# Altium PCB PCB.PcbDoc (part 2 of 2)
Units mm, origin at the board's own origin, x right, y up, seen from the top; angles counter-clockwise.
Board outline 44.3 x 31.8 mm, 4 copper layers (Top Layer, Int1 (GND), Int2 (PWR), Bottom Layer), stack 1.369 mm thick; 105 components, 87 nets, 372 pads, 193 vias.
Unrouted connection lines stored in the file: 3.
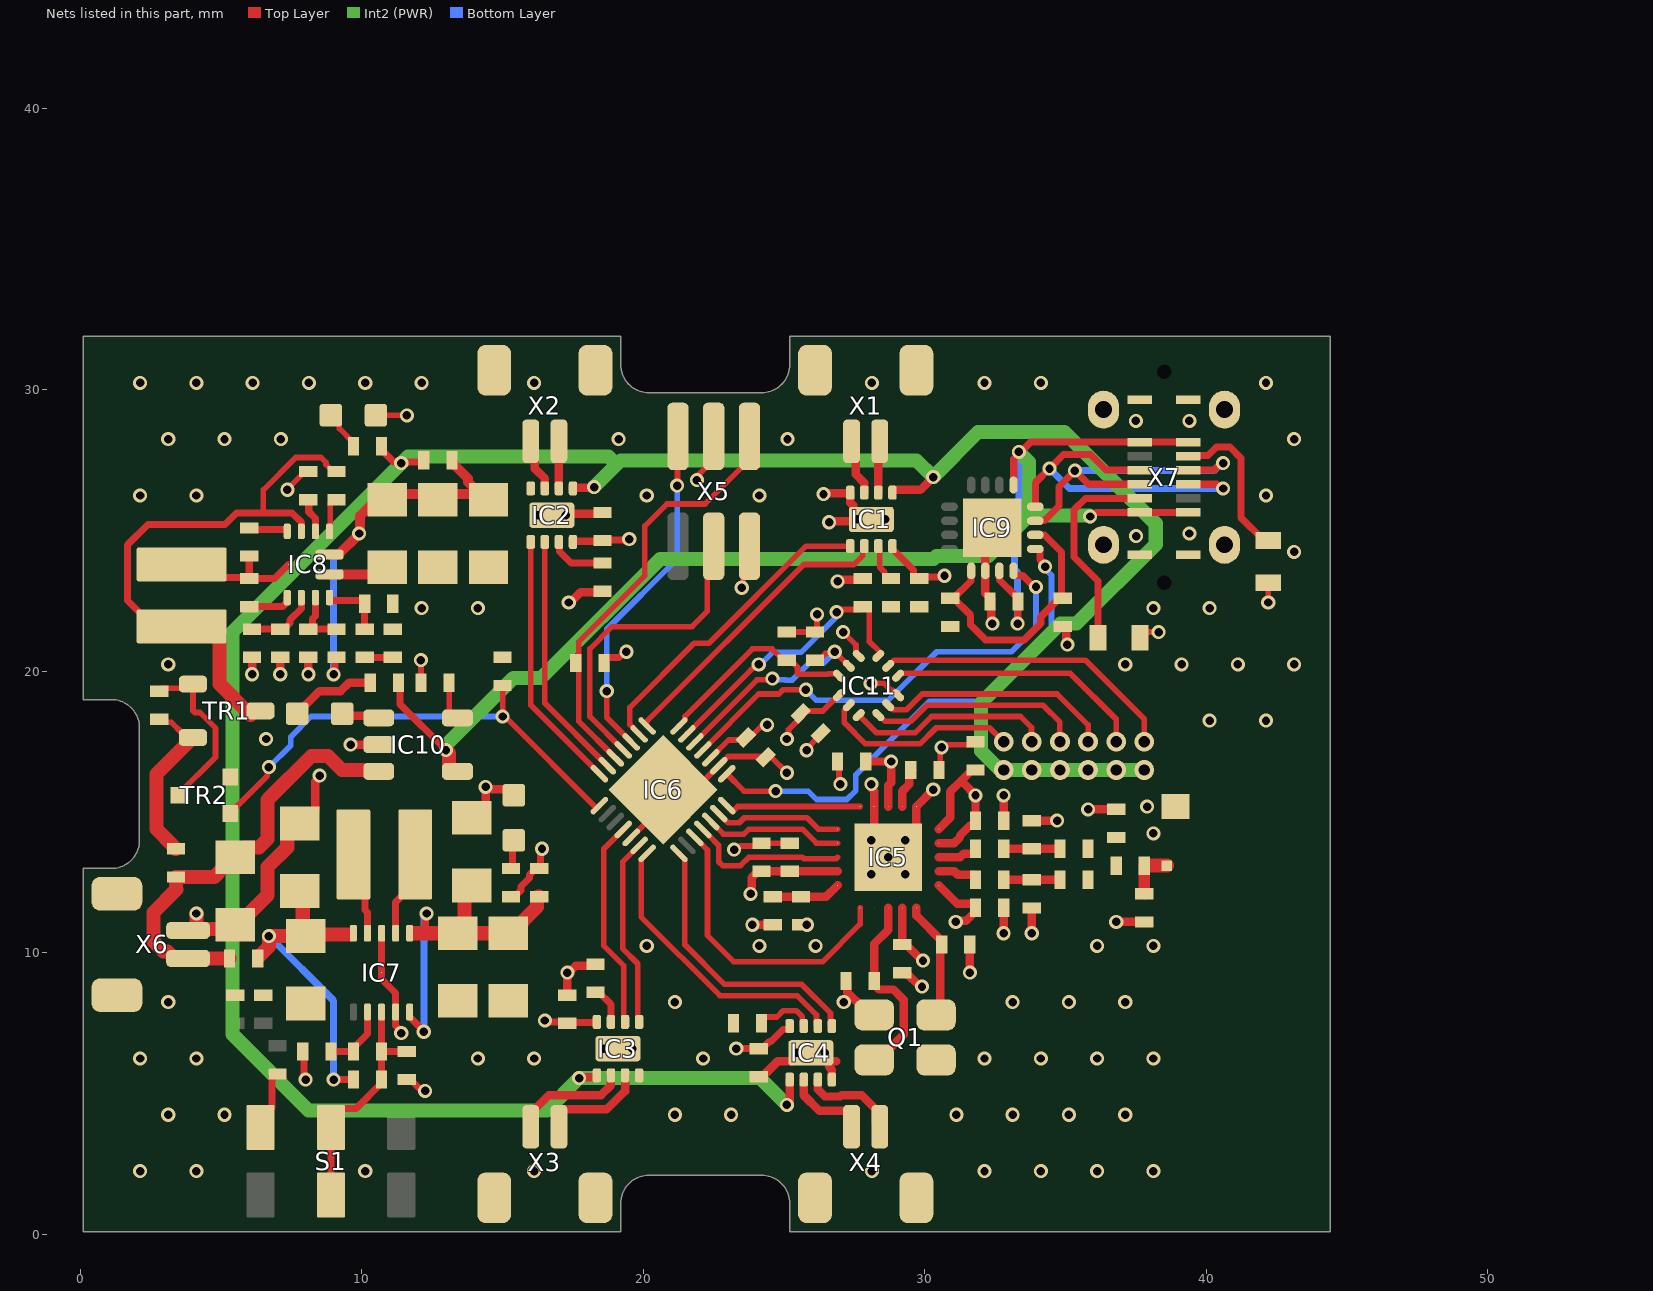
[diagram p4: the nets of this part, all layers, seen from the top]

## Via types
v1: diameter 0.5, hole 0.3, Top Layer to Bottom Layer, tented bottom, 179 vias
v2: diameter 0.7, hole 0.4, Top Layer to Bottom Layer, 14 vias

## Nets (pads, with @x,y where several pads share a name; then routed paths per layer and width w, separated by ;. In a path a pad name is that pad's centre, name@x,y a point inside that pad or via, vN(x,y) a via of type N, cw(c..) or ccw(c..) an arc to the next point about the centre after c; other vN are vias at no path point) (continued)
GND: C1.1 C5.2 C6.2 C7.1 C8.1 C9.1 C10.1 C11.1 C12.1 C13.1 C14.1 C15.1 C16.2 C17.2 C18.2 C19.1 C20.1 C21.1 C22.1 C23.1 C24.1 C25.1 C27.1 C28.1 C29.1 C30.2 C31.2 C32.2 C33.2 C34.2 C35.1 C36.1 C37.1 C38.1 C39.1 C40.1 C41.1 D1.2 D2.2 IC1.4 IC1.9 IC2.4 IC2.9 IC3.4 IC3.9 IC4.4 IC4.9 IC5.16 IC5.19 IC5.21 IC6.5 IC6.16 IC6.29 IC7.3 IC7.9 IC7.11 IC8.5 IC9.2 IC9.17 IC10.2 IC11.6 IC11.10 L3.1 P1.2 Q1.2 Q1.4 R1.1 R3.1 R6.1 R8.1 R18.1 R19.1 R21.1 R22.1 R26.1 R28.1 R29.1 R30.1 R31.1 R33.1 TR2.2 X1.0 X2.0 X3.0 X4.0 X5.3 X6.0 X6.2 X7.A1 X7.A12 X7.B1 X7.B12 X7.SHELL | length 74
  Top Layer w0.2: v1(7.352,26.454) 7.352,26.477 7.975,27.1 R19.1@8.1,27.1 ; D2.2@10.5,29.1 v1(11.6,29.1) ; R26.1@12.1,19.6 v1(12.1,20.4) ; IC6.5@19.569,14.103 20.7,15.234 IC6.29@20.7,15.8 21.831,15.8 IC6.16@22.68,16.649 23.009,16.978 24.157,16.978 24.271,16.864 24.383,16.976 24.524,16.976 v1(25.1,16.4) ; v1(21.9,26.8) 21.957,26.857 21.957,26.987 22.5,27.53 X5.3@22.5,28.35 ; v1(23.228,13.672) 23.309,13.672 23.437,13.8 24.1,13.8 C7.1@24.2,13.9 C9.1@25.2,13.9 ; v1(25.8,17.2) 25.8,17.25 26.3,17.75 C41.1@26.3,17.8 ; C11.1@26.9,16.8 26.95,16.75 26.95,16.05 v1(27,16) ; v1(27.1,21.4) 27.557,20.943 27.557,20.65 IC11.10@27.654,20.554 ; v1(28.075,19.575) 28.548,19.575 28.791,19.332 28.859,19.332 29.037,19.154 IC11.6@29.054,19.154 ; R1.1@30.5,16.5 30.55,16.55 30.55,17.25 v1(30.6,17.3) 30.681,17.3 30.781,17.4 31.7,17.4 C15.1@31.8,17.5 C15.1@31.925,17.5 ; R22.1@37.65,21.2 37.85,21.4 v1(38.307,21.4) ; v1(42.2,22.45) R21.1@42.2,23.15
  Top Layer w0.25: R6.1@7.9,6.5 7.952,6.448 7.952,5.548 v1(8,5.5) ; IC7.3@10.7,10.7 10.7,9.075 11.2,8.575 11.2,7.418 11.4,7.218 v1(11.4,7.15) ; C24.1@11.6,5.5 11.725,5.5 12.077,5.148 12.202,5.148 v1(12.25,5.1)
  Top Layer w0.3: v1(6.1,19.9) C32.2@6.1,20.5 ; v1(7.1,19.9) C33.2@7.1,20.5 ; C22.1@7.9,14.6 8.35,15.05 8.35,16.096 8.5,16.246 v1(8.5,16.3) ; v1(8.1,19.9) R18.1@8.1,20.5 ; v1(9.6,17.4) IC10.2@10.6,17.4 ; C20.1@13.9,14.8 13.95,14.8 14.4,15.25 v1(14.4,15.9) 14.454,15.9 14.547,15.807 15.193,15.807 D1.2@15.4,15.6 ; v1(17.25,25.55) 17.3,25.6 18.5,25.6 C38.1@18.55,25.65 ; C39.1@17.3,8.5 v1(17.3,9.3) 17.354,9.3 17.604,9.55 18.25,9.55 R30.1@18.3,9.6 ; v1(17.35,22.45) 17.404,22.45 17.775,22.821 18.521,22.821 R29.1@18.55,22.85 ; v1(23.874,11) C8.1@24.6,11 ; C40.1@24.1,5.6 24.225,5.6 24.775,6.15 25.3,6.15 25.45,6.3 v1(25.45,6.45) ; C10.1@25.6,11 v1(25.807,11) ; v1(26.4,26.3) 26.425,26.325 27.35,26.325 IC1.4@27.35,26.35 27.35,25.999 27.45,25.899 27.45,25.55 v1(27.6,25.4) 27.538,25.338 26.638,25.338 v1(26.6,25.3) ; v1(26.45,6.45) 26.45,6.3 IC4.9@26.6,6.15 ; IC4.4@26.7,5.5 26.7,5.851 26.6,5.951 IC4.9@26.6,6.15 ; 26.85,6.15 IC4.9@26.6,6.15 ; v1(26.9,23.2) 26.954,23.2 27.004,23.25 27.75,23.25 R3.1@27.8,23.3 ; C17.2@27.2,9 27.25,8.95 27.25,8.6 Q1.4@27.8,8.05 ; v1(28.1,14) IC5.21@28.2,13.9 ; v1(28.1,16) 28.138,15.962 28.138,15.807 28.2,15.745 IC5.21@28.2,13.9 ; v1(28.7,13.4) IC5.21@28.2,13.9 ; C12.1@29.2,9.3 29.25,9.25 29.375,9.25 29.787,8.838 29.862,8.838 v1(29.9,8.8) ; IC5.21@29.7,14.4 IC5.16@29.7,15.2 v1(30.3,15.8) ; v1(31.6,9.3) C16.2@31.6,10.3 ; v1(32.4,21.7) 32.362,21.738 32.362,22.563 32.15,22.775 32.15,24.85 IC9.17@32.4,25.1 ; v1(32.8,10.7) C13.1@32.8,11.6 ; C14.1@32.8,14.7 v1(32.8,15.6) ; v1(33.8,10.7) C1.1@33.8,11.6 ; L3.1@33.8,14.7 v1(34.7,14.7) ; v1(35.8,15.1) C5.2@36.8,15.1 ; v1(36.8,11.1) C6.2@37.8,11.1
  Top Layer w0.35: IC8.5@8.85,23.45 10.25,23.45 10.6,23.8 10.8,23.8 C29.1@10.9,23.7
  Top Layer w0.5: v1(4.121,11.4) X6.2@4.121,10.85 ; C22.1@7.9,14.6 7.7,14.6 7.35,14.25 7.35,13.75 6.65,13.05 6.65,12.05 5.6,11 C36.1@5.5,11 5.35,10.85 3.875,10.85 X6.2@3.825,10.8 X6.2@4.071,10.8 ; X6.2@4.071,10.8 X6.2@4.121,10.85 ; X6.2@4.071,10.8 X6.2@4.121,10.85
  other v1: 2.121,2.25 4.121,2.25 10.121,2.25 16.121,2.25 28.121,2.25 32.121,2.25 34.121,2.25 36.121,2.25 38.121,2.25 3.121,4.25 5.121,4.25 21.121,4.25 23.121,4.25 31.121,4.25 33.121,4.25 35.121,4.25 37.121,4.25 2.121,6.25 4.121,6.25 14.121,6.25 16.121,6.25 22.121,6.25 32.121,6.25 34.121,6.25 36.121,6.25 38.121,6.25 18.6,6.6 19.6,6.6 3.121,8.25 21.121,8.25 27.121,8.25 33.121,8.25 35.121,8.25 37.121,8.25 20.121,10.25 24.121,10.25 26.121,10.25 36.121,10.25 38.121,10.25 28.1,12.8 29.3,12.8 29.3,14 38.121,14.25 37.9,15.2 6.6,17.6 40.121,18.25 42.121,18.25 3.121,20.25 37.121,20.25 39.121,20.25 41.121,20.25 43.121,20.25 12.121,22.25 14.121,22.25 38.121,22.25 40.121,22.25 43.121,24.25 37.505,24.805 39.4,24.9 28.6,25.4 16.25,25.55 2.121,26.25 4.121,26.25 20.121,26.25 24.121,26.25 42.121,26.25 3.121,28.25 5.121,28.25 7.121,28.25 19.121,28.25 25.121,28.25 43.121,28.25 37.5,28.9 39.4,28.9 2.121,30.25 4.121,30.25 6.121,30.25 8.121,30.25 10.121,30.25 12.121,30.25 16.121,30.25 28.121,30.25 32.121,30.25 34.121,30.25 42.121,30.25
ICSPCLK: IC6.24 X5.5 | length 12.3
  Top Layer w0.2: v1(18.7,19.3) 18.7,18.366 IC6.24@19.569,17.497 ; v1(21.2,26.6) 21.215,26.615 21.215,28.335 X5.5@21.23,28.35
  Bottom Layer w0.2: v1(18.7,19.3) 18.7,21.5 21.2,24 v1(21.2,26.6)
ICSPDAT: IC6.25 X5.4 | length 11.2
  Top Layer w0.2: IC6.25@19.286,17.214 18.1,18.4 18.1,20.8 18.893,21.593 21.727,21.593 22.276,22.142 22.276,24.226 X5.4@22.5,24.45
M1_IN1: IC1.6 IC6.22 | length 10.7
  Top Layer w0.2: IC6.22@20.134,18.063 20.049,18.149 20.134,18.234 25.7,23.8 27.48,23.8 27.8,24.12 27.8,24.4 IC1.6@27.85,24.45
M1_IN2: IC1.5 IC6.23 | length 11.3
  Top Layer w0.2: IC6.23@19.851,17.78 19.522,18.109 19.522,18.722 21.8,21 22.334,21 25.784,24.45 IC1.5@27.35,24.45
M2_IN1: IC2.6 IC6.27 | length 8.9
  Top Layer w0.2: IC2.6@16.5,24.6 16.5,18.869 IC6.27@18.72,16.649
M2_IN2: IC2.5 IC6.28 | length 9.2
  Top Layer w0.2: IC2.5@16,24.6 16,18.803 IC6.28@18.437,16.366
M3_IN1: IC3.6 IC6.4 | length 7.4
  Top Layer w0.2: IC6.4@19.286,14.386 18.6,13.7 18.6,10.249 19.3,9.549 19.3,7.815 19.3,7.6 IC3.6@19.35,7.55
M3_IN2: IC3.5 IC6.6 | length 6.8
  Top Layer w0.2: IC3.5@19.85,7.55 19.8,7.6 19.8,9.615 19.264,10.151 19.264,13.232 IC6.6@19.851,13.82
M4_IN1: IC4.6 IC6.7 | length 10.4
  Top Layer w0.2: IC6.7@20.134,13.537 19.922,13.325 19.922,11.281 22.72,8.483 25.463,8.483 26.15,7.796 26.15,7.45 IC4.6@26.2,7.4
M4_IN2: IC4.5 IC6.8 | length 10
  Top Layer w0.2: IC6.8@21.266,13.537 21.478,13.325 21.478,10.291 22.886,8.883 25.629,8.883 26.65,7.862 26.65,7.45 IC4.5@26.7,7.4
M\C\L\R\: IC6.26 R2.1 X5.1 | length 15.3
  Top Layer w0.2: R2.1@17.6,20.3 R2.1@17.7,20.2 ; R2.1@17.7,20.3 R2.1@17.7,20.2 ; R2.1@17.7,20.4 17.7,21.051 20.055,23.405 20.055,25.168 20.837,25.95 22.19,25.95 23.77,27.53 X5.1@23.77,28.35 ; IC6.26@19.003,16.931 17.7,18.234 R2.1@17.7,20.2
MISO: IC5.2 IC6.12 | length 5
  Top Layer w0.2: IC6.12@22.397,14.669 22.844,14.222 23.573,14.222 23.751,14.4 25.649,14.4 26.149,13.9 IC5.2@26.9,13.9
MOSI: IC5.20 IC6.14 | length 4.9
  Top Layer w0.2: IC6.14@22.963,15.234 23.175,15.022 23.353,15.2 IC5.20@27.7,15.2
NetC1_2: C1.2 C2.2 L1.1 | length 2
  Top Layer w0.3: C2.2@32.8,12.6 L1.1@34.8,12.6
NetC3_2: C3.2 C4.2 L3.2 | length 2
  Top Layer w0.3: C3.2@32.8,13.7 C4.2@34.8,13.7
NetC4_1: C4.1 C5.1 L1.2 L2.1
NetC6_1: C6.1 L2.2 P1.1 | length 1.7
  Top Layer w0.4: C6.1@37.8,12.1 L2.2@37.8,13.1
  Top Layer w0.5: L2.2@37.858,13.1 P1.1@38.6,13.1
NetC8_2: C8.2 C10.2 IC5.5 | length 2.5
  Top Layer w0.3: C8.2@24.6,12 26.5,12 IC5.5@26.9,12.4
NetC16_1: C16.1 IC5.10 Q1.3 | length 4.3
  Top Layer w0.3: IC5.10@29.7,11.6 29.7,11.325 30.6,10.425 30.55,10.375 30.55,7.95 Q1.3@30.4,7.8
NetC17_1: C17.1 IC5.8 Q1.1 | length 6.9
  Top Layer w0.3: Q1.1@28.2,6.2 28.35,6.2 29.25,7.1 29.25,8.334 28.884,8.7 28.375,8.7 28.2,8.875 28.2,10.32 28.7,10.82 IC5.8@28.7,11.6
NetC19_2: C19.2 C20.2 C21.2 IC7.1 IC7.10 R10.1 | length 13
  Top Layer w0.25: IC7.10@11.7,7.9 11.7,7.725 12.2,7.225 v1(12.2,7.2) ; 12.25,10.7 12.25,10.938 12.252,10.94 12.252,11.352 v1(12.3,11.4)
  Top Layer w0.5: 11.825,10.7 12.25,10.7 C19.2@13.4,10.7 ; C20.2@13.9,12.4 13.65,12.15 13.65,10.95 C19.2@13.4,10.7 ; R10.1@16.3,12 16.275,12 16.225,11.95 16.225,11.625 15.3,10.7 C19.2@13.4,10.7
  Bottom Layer w0.25: v1(12.2,7.2) 12.2,11.232 12.3,11.332 v1(12.3,11.4)
NetC22_2: C22.2 C23.2 IC7.5 R4.1 R9.2 | length 12.2
  Top Layer w0.25: v1(9,5.5) R4.1@9.7,5.5
  Top Layer w0.5: R9.2@6.35,9.875 6.7,10.225 v1(6.7,10.6) C23.2@8,10.6 ; C22.2@7.8,12.2 7.9,12.1 7.9,10.7 C23.2@8,10.6 ; IC7.5@9.575,10.65 8.05,10.65 C23.2@8,10.6
  Bottom Layer w0.25: v1(6.7,10.6) 9,8.3 v1(9,5.5)
NetC26_1: C26.1 IC8.10 | length 1.4
  Top Layer w0.25: C26.1@6,25.1 6.062,25.037 7.35,25.037 IC8.10@7.35,24.975
NetC26_2: C26.2 IC8.11 L5.2 R14.2 | length 5
  Top Layer w0.25: L5.2@3.6,23.8 4.058,23.342 5.958,23.342 R14.2@6,23.3 ; C26.2@6,24.1 R14.2@6,23.3 ; IC8.11@7.4,23.8 6.9,23.3 R14.2@6,23.3
NetC27_2: C27.2 C28.2 C29.2 IC8.6 R13.1 R15.2 | length 15.9
  Top Layer w0.25: v1(8.999,19.899) 9.046,19.946 9.046,20.446 R15.2@9.1,20.5
  Top Layer w0.35: v1(9.9,24.9) 9.9,24.875 IC8.6@9.175,24.15 ; v1@9.959,24.939 9.929,24.969 9.929,25.529 10.6,26.2 10.8,26.2 C29.2@10.9,26.1 ; R13.1@13.2,27.5 13.2,27.375 13.225,27.35 13.28,27.35 13.775,26.855 13.775,26.725 C27.2@14.3,26.2 ; C27.2@14.5,26.1 14.3,26.3 C28.2@12.9,26.3 ; IC8.6@9.175,24.15 IC8.6@8.85,24.15 IC8.6@9.175,24.15 ; C29.2@10.9,26.1 C29.2@11.1,26.3 ; C29.2@10.9,26.1 C29.2@11.1,26.3 ; C29.2@11.1,26.3 12.5,26.3 C28.2@12.7,26.1 ; C28.2@12.7,26.1 C28.2@12.9,26.3 ; C28.2@12.7,26.1 C28.2@12.9,26.3
  Bottom Layer w0.25: v1(8.999,19.899) 8.999,23.998 v1(9.9,24.9)
NetC30_1: C30.1 IC8.4 R17.2 | length 2.3
  Top Layer w0.25: IC8.4@8.85,22.625 8.85,22.512 10.025,22.512 10.1,22.437 R17.2@10.1,21.5
NetC31_1: C31.1 R17.1 | length 1.1
  Top Layer w0.25: R17.1@10,20.5 C31.1@11.1,20.5
NetC32_1: C32.1 C33.1 IC8.2 | length 2.5
  Top Layer w0.25: C32.1@6.1,21.5 7.225,21.5 7.45,21.725 7.45,21.835 7.85,22.235 IC8.2@7.85,22.625
NetC35_2: C35.2 IC9.1 IC9.6 R23.2 | length 9.6
  Top Layer w0.25: C35.2@30.9,22.6 C35.2@31.025,22.6 ; IC9.1@31.65,23.575 31.64,23.565 31.64,23.215 C35.2@31.025,22.6 ; IC9.6@33.925,24.85 33.935,24.84 34.256,24.84 34.85,24.247 34.85,22.65 R23.2@34.9,22.6 34.775,22.6 34.119,21.944 34.119,21.706 33.538,21.125 32.162,21.125 31.631,21.656 31.631,21.994 C35.2@31.025,22.6
NetD1_1: D1.1 R7.1 | length 1
  Top Layer w0.25: R7.1@15.3,13 15.35,13.05 15.35,13.95 D1.1@15.4,14
NetD2_1: D2.1 R16.1 | length 1.4
  Top Layer w0.2: D2.1@8.9,29.1 9.2,28.8 9.2,28.625 9.7,28.125 R16.1@9.7,28
NetD3_1: D3.1 R27.2 | length 3.1
  Top Layer w0.3: D3.1@7.7,18.5 8.499,19.299 9.247,19.299 9.549,19.6 R27.2@10.3,19.6
NetD3_2: D3.2 IC10.1 | length 1.4
  Top Layer w0.3: D3.2@9.3,18.5 9.375,18.425 10.525,18.425 IC10.1@10.6,18.35
NetIC1_2: IC1.2 X1.2 | length 1.8
  Top Layer w0.3: IC1.2@28.35,26.35 28.35,28.125 X1.2@28.4,28.175
NetIC1_3: IC1.3 X1.1 | length 2
  Top Layer w0.3: X1.1@27.4,28.175 27.55,28.025 27.55,27.001 27.85,26.701 IC1.3@27.85,26.35
NetIC1_7: IC1.7 R28.2 | length 1.4
  Top Layer w0.2: IC1.7@28.35,24.45 28.4,24.4 28.4,23.7 28.575,23.525 28.575,23.4 28.675,23.3 R28.2@28.8,23.3
NetIC2_2: IC2.2 X2.2 | length 1.7
  Top Layer w0.3: IC2.2@17,26.5 X2.2@17,28.175
NetIC2_3: IC2.3 X2.1 | length 1.9
  Top Layer w0.3: X2.1@16,28.175 16.15,28.025 16.15,27.201 16.5,26.851 IC2.3@16.5,26.5
NetIC2_7: IC2.7 R29.2 | length 2
  Top Layer w0.25: IC2.7@17,24.6 17.025,24.575 17.025,24.259 17.434,23.85 R29.2@18.55,23.85
NetIC3_2: IC3.2 X3.2 | length 4.1
  Top Layer w0.3: X3.2@16,3.825 16,4.3 16.35,4.65 16.35,4.657 16.643,4.95 18.501,4.95 18.85,5.299 IC3.2@18.85,5.65
NetIC3_3: IC3.3 X3.1 | length 3.7
  Top Layer w0.3: X3.1@17,3.825 17,4.3 17.15,4.45 18.708,4.45 19.35,5.092 IC3.3@19.35,5.65
NetIC3_7: IC3.7 R30.2 | length 1.4
  Top Layer w0.25: R30.2@18.3,8.6 18.425,8.6 18.85,8.175 IC3.7@18.85,7.55
NetIC4_2: IC4.2 X4.2 | length 3
  Top Layer w0.3: IC4.2@25.7,5.5 25.7,4.942 26.242,4.4 27.25,4.4 27.4,4.25 X4.2@27.4,3.825
NetIC4_3: IC4.3 X4.1 | length 3.4
  Top Layer w0.3: IC4.3@26.2,5.5 26.2,5.149 26.449,4.9 26.993,4.9 27.043,4.95 27.757,4.95 28.25,4.457 28.25,3.975 X4.1@28.4,3.825
NetIC4_7: IC4.7 R31.2 | length 2.2
  Top Layer w0.2: R31.2@24.2,7.5 24.2,7.625 24.3,7.725 24.745,7.725 24.97,7.95 25.43,7.95 25.65,7.73 25.65,7.45 IC4.7@25.7,7.4
NetIC5_3: IC5.3 IC6.11 | length 5.8
  Top Layer w0.2: IC6.11@22.114,14.386 22.326,14.174 22.678,13.822 22.678,13.239 22.817,13.1 23.451,13.1 23.751,13.4 25.649,13.4 25.699,13.35 26.85,13.35 IC5.3@26.9,13.4
NetIC5_6: IC5.6 IC6.10 | length 10.6
  Top Layer w0.2: IC6.10@21.831,14.103 22.278,13.656 22.278,10.622 23.217,9.683 26.361,9.683 27.7,11.022 IC5.6@27.7,11.6
NetIC5_17: IC5.17 R1.2 | length 1.4
  Top Layer w0.3: IC5.17@29.2,15.2 29.2,15.745 29.45,15.995 29.45,16.375 29.525,16.45 29.525,16.475 R1.2@29.55,16.5
NetIC6_1: IC6.1 R33.2 TR2.1 | length 17.4
  Top Layer w0.2: TR2.1@5.325,14.95 5.325,14.975 6.643,16.293 6.643,16.543 v1(6.7,16.6) ; R33.2@15,19.5 v1(15,18.4) 15.057,18.343 15.139,18.343 18.342,15.139 IC6.1@18.437,15.234
  Bottom Layer w0.2: v1(6.7,16.6) 7.479,17.379 7.479,17.679 8.2,18.4 v1(15,18.4)
NetIC6_19: IC6.19 IC11.11 R25.1 | length 7.7
  Top Layer w0.2: IC6.19@21.831,17.497 24.034,19.7 24.54,19.7 v1(24.587,19.748) ; R25.1@26.1,20.4 26.225,20.4 26.468,20.643 26.743,20.643 v1(26.8,20.7) IC11.11@27.148,20.352
  Bottom Layer w0.2: v1(24.587,19.748) 24.627,19.708 25.04,19.708 25.055,19.692 25.292,19.692 25.89,20.29 26.39,20.29 v1(26.8,20.7)
NetIC6_20: IC6.20 IC11.9 R3.2 | length 10.3
  Top Layer w0.2: IC6.20@21.549,17.78 23.826,20.058 24.019,20.25 v1(24.1,20.25) ; v1(26.867,22.108) 26.948,22.108 27.041,22.2 27.7,22.2 R3.2@27.8,22.3 27.925,22.3 28.025,22.2 28.025,21.061 28.42,20.666 28.42,20.627 IC11.9@28.346,20.554
  Bottom Layer w0.2: v1(24.1,20.25) 24.161,20.25 24.59,20.679 25.6,20.679 26.81,21.889 26.81,22.05 v1(26.867,22.108)
NetIC6_21: IC6.21 IC11.12 R24.1 | length 7.4
  Top Layer w0.2: IC6.21@21.266,18.063 21.478,18.275 21.478,18.406 23.872,20.8 24.575,20.8 24.975,20.4 25.225,20.4 25.475,20.15 25.475,19.925 25.5,19.9 26.549,19.9 26.569,19.92 26.873,19.92 IC11.12@26.946,19.846
NetIC7_2: IC7.2 L4.2 | length 3.1
  Top Layer w0.25: IC7.2@11.2,10.7 11.2,11.8 11.9,12.5 L4.2@11.9,13.5
NetIC7_4: IC7.4 L4.1 | length 3
  Top Layer w0.25: L4.1@9.7,13.5 10.115,13.085 10.115,11.522 10.2,11.438 IC7.4@10.2,10.7
NetIC7_7: IC7.7 R5.2 R6.2 | length 2.4
  Top Layer w0.25: R6.2@8.9,6.5 R5.2@9.7,6.5 9.7,6.625 10.2,7.125 IC7.7@10.2,7.9
NetIC8_1: IC8.1 R14.1 | length 1.6
  Top Layer w0.25: R14.1@6,22.3 7.175,22.3 7.35,22.475 IC8.1@7.35,22.625
NetIC8_3: IC8.3 R15.1 R18.2 | length 2.2
  Top Layer w0.25: R18.2@8.1,21.5 8.164,21.5 8.239,21.575 8.239,21.864 8.35,21.975 IC8.3@8.35,22.625 ; R18.2@8.2,21.5 R15.1@9.1,21.5
NetIC8_7: IC8.7 R20.1 | length 1.3
  Top Layer w0.2: IC8.7@8.85,24.975 8.875,25 8.875,26 8.975,26.1 R20.1@9.1,26.1
NetIC8_8: IC8.8 R19.2 | length 1.2
  Top Layer w0.25: R19.2@8.1,26.1 8.1,26.038 8.113,26.025 8.113,25.671 8.35,25.434 IC8.8@8.35,24.975
NetIC8_9: IC8.9 L5.1 R20.2 TR1.3 | length 20.7
  Top Layer w0.2: 6.5,25.625 6.5,26.449 7.651,27.6 8.549,27.6 8.725,27.424 8.725,27.35 8.975,27.1 R20.2@9.1,27.1
  Top Layer w0.25: L5.1@3.6,21.6 2.6,21.6 1.675,22.525 1.675,24.499 2.401,25.225 5.14,25.225 5.54,25.625 6.5,25.625 7.523,25.625 7.85,25.298 IC8.9@7.85,24.975
  Top Layer w0.5: L5.1@3.6,21.6 4.6,21.6 4.95,21.25 4.95,19.55 6.05,18.45 6.2,18.6 TR1.3@6.4,18.6
NetIC10_5: IC10.5 R26.2 | length 1.4
  Top Layer w0.2: R26.2@13.1,19.6 13.1,18.546 13.296,18.35 IC10.5@13.4,18.35
NetIC11_2: IC11.2 | length 7.1
  Top Layer w0.2: IC11.2@27.3,18.8 27.3,18.784 27.139,18.622 27.139,18.183 27.897,17.425 29.83,17.425 30.405,18 32.3,18 v2(32.8,17.5)
NetIC11_3: IC11.3 | length 7.3
  Top Layer w0.2: IC11.3@27.654,18.446 28.275,17.825 29.665,17.825 30.24,18.4 33.4,18.4 33.79,18.01 33.79,17.51 v2(33.8,17.5)
NetIC11_4: IC11.4 | length 7.7
  Top Layer w0.2: IC11.4@28.346,18.446 28.363,18.446 28.584,18.225 29.499,18.225 30.074,18.8 34.2,18.8 34.8,18.2 v2(34.8,17.5)
NetIC11_5: IC11.5 | length 8.5
  Top Layer w0.2: IC11.5@28.7,18.8 28.716,18.8 28.878,18.639 29.347,18.639 29.908,19.2 34.7,19.2 35.8,18.1 v2(35.8,17.5)
NetIC11_7: IC11.7 | length 9.3
  Top Layer w0.2: IC11.7@29.054,19.846 29.138,19.931 35.169,19.931 36.8,18.3 v2(36.8,17.5)
NetIC11_8: IC11.8 | length 10.9
  Top Layer w0.2: IC11.8@28.7,20.2 28.716,20.2 28.916,20.4 35.7,20.4 37.8,18.3 v2(37.8,17.5)
NetR11_1: R11.1 S1.3 | length 2.2
  Top Layer w0.25: S1.3@6.4,3.8 6.4,4.1 6.8,4.5 6.8,5.625 6.875,5.7 R11.1@7,5.7
NetR12_2: R12.2 R32.2 TR1.2 | length 6.3
  Top Layer w0.2: R32.2@2.8,18.3 2.9,18.2 3.223,18.2 3.636,17.786 3.636,17.486 TR1.2@3.736,17.386
  Top Layer w0.5: R12.2@3.4,13.7 3.375,13.7 3.275,13.8 3.275,13.825 2.7,14.4 2.7,16.35 3.736,17.386 TR1.2@4,17.65
NetR21_2: R21.2 X7.A5 | length 5.6
  Top Layer w0.25: X7.A5@39.365,27.65 39.39,27.675 40.062,27.675 40.362,27.975 40.838,27.975 41.225,27.588 41.225,25.475 42.05,24.65 R21.2@42.2,24.65
NetR22_2: R22.2 X7.B5 | length 7.4
  Top Layer w0.25: R22.2@36.15,21.2 36.15,23.209 35.3,24.059 35.3,25.743 35.707,26.15 X7.B5@37.635,26.15
NetR32_1: R32.1 TR1.1 TR2.3 | length 6.2
  Top Layer w0.2: R32.1@2.8,19.3 2.9,19.4 3.85,19.4 TR1.1@4,19.55 4,18.6 4.057,18.543 4.244,18.543 4.8,17.986 4.8,16.95 3.475,15.625 TR2.3@3.475,15.6
RF_N: C3.1 IC5.13 | length 1.5
  Top Layer w0.3: IC5.13@30.5,13.4 31.252,13.4 31.377,13.525 31.75,13.525 31.8,13.575 C3.1@31.8,13.7
RF_P: C2.1 IC5.12 | length 1.5
  Top Layer w0.3: IC5.12@30.5,12.9 31.045,12.9 31.17,12.775 31.75,12.775 31.8,12.725 C2.1@31.8,12.6
RX: IC6.18 IC9.4 | length 16.5
  Top Layer w0.2: IC6.18@22.114,17.214 24.098,19.198 24.815,19.198 24.968,19.35 v1(25.773,19.35)
  Top Layer w0.25: IC9.4@33.15,23.575 33.15,23.439 33.173,23.415 33.474,23.415 33.883,23.007 v1(33.95,23.007)
  Bottom Layer w0.2: v1(25.773,19.35) 26.14,18.983 28.705,18.983 30.422,20.7 33.078,20.7 33.95,21.572 v1(33.95,23.007)
SCLK: IC5.1 IC6.13 | length 4.6
  Top Layer w0.2: IC6.13@22.68,14.951 23.009,14.622 23.407,14.622 23.585,14.8 25.7,14.8 25.815,14.8 26.215,14.4 IC5.1@26.9,14.4
TX: IC6.15 IC9.5 | length 17.9
  Top Layer w0.2: IC6.15@22.963,16.366 23.578,15.75 v1(24.7,15.75)
  Top Layer w0.25: IC9.5@33.925,24.35 34.061,24.35 34.085,24.327 34.085,23.984 34.275,23.793 v1(34.275,23.725)
  Bottom Layer w0.2: v1(24.7,15.75) 25.854,15.75 26.154,15.45 27.228,15.45 27.55,15.772 27.55,16.328 30.164,18.942 31.886,18.942 34.5,21.557 34.5,23.419 34.275,23.644 v1(34.275,23.725)
USBDM: IC9.8 X7.A7 X7.B7 | length 13
  Top Layer w0.25: IC9.8@33.925,25.85 33.925,26.701 v1(34.43,27.207) ; v1@34.475,27.175 34.475,27.251 34.93,27.707 35.883,27.707 36.44,27.15 X7.B7@37.635,27.15 ; X7.A7@39.365,26.65 40.382,26.65 40.532,26.5 v1(40.6,26.5)
  Bottom Layer w0.25: v1(34.43,27.207) 35.137,26.5 v1(40.6,26.5)
USBDP: IC9.7 X7.A6 X7.B6 | length 11.8
  Top Layer w0.25: IC9.7@33.925,25.35 33.935,25.36 34.256,25.36 34.77,25.873 34.77,26.57 v1(35.332,27.132) 35.813,26.65 X7.B6@37.635,26.65 ; X7.A6@39.365,27.15 40.282,27.15 40.532,27.4 v1(40.6,27.4)
  Bottom Layer w0.25: v1(35.332,27.132) 40.264,27.132 40.532,27.4 v1(40.6,27.4)
V_MOT: IC1.1 IC2.1 IC3.1 IC4.1 R13.2 R16.2 | length 98
  Top Layer w0.25: R16.2@10.7,28 10.7,27.875 11.127,27.448 11.352,27.448 v1(11.4,27.4) 11.448,27.448 12.148,27.448 R13.2@12.2,27.5
  Top Layer w0.3: IC2.1@17.5,26.5 17.5,26.525 18.225,26.525 v1(18.25,26.55) ; v1(17.721,5.55) 17.759,5.588 18.35,5.588 IC3.1@18.35,5.65 ; v1(25.1,4.6) 25.1,4.654 25.2,4.754 IC4.1@25.2,5.5 ; IC1.1@28.85,26.35 28.85,26.45 29.845,26.45 v1(30.3,26.905)
  Int2 (PWR) w0.5: v1(18.25,26.55) 19.05,27.35 ; v1(25.1,4.6) 24.15,5.55 v1(17.721,5.55) 16.571,4.4 8.11,4.4 5.4,7.11 5.4,21.4 11.643,27.643 18.757,27.643 19.05,27.35 ; v2(37.8,16.5) v2(32.8,16.5) 32.762,16.538 32.63,16.538 32,17.169 32,18.878 34.818,21.697 35.387,21.697 38.205,24.515 38.205,25.248 34.953,28.5 31.895,28.5 v1(30.3,26.905) 29.705,27.5 19.2,27.5 19.05,27.35
  other v2: 33.8,16.5 34.8,16.5 35.8,16.5 36.8,16.5
VBAT: C36.2 IC10.3 R9.1 R12.1 X6.1 | length 15.7
  Top Layer w0.5: R9.1@5.3,9.8 X6.1@3.825,9.8 3.775,9.85 3.3,9.85 3.1,10.05 2.951,10.05 2.6,10.401 2.6,11.439 3.421,12.26 3.4,12.281 R12.1@3.4,12.7 4.757,12.7 5.05,12.993 5.05,13.05 5.4,13.4 C36.2@5.5,13.4 5.85,13.75 6.35,13.75 6.65,14.05 6.65,15.44 8.21,17 8.8,17 9.3,16.5 10.55,16.5 IC10.3@10.6,16.45
VBUS: C34.1 IC9.3 IC9.9 IC10.4 R27.1 X7.A4 X7.A9 X7.B4 X7.B9 | length 54.9
  Top Layer w0.25: R27.1@11.3,19.6 11.362,19.538 11.362,18.832 v1(12.99,17.204) ; IC9.3@32.65,23.575 32.66,23.565 32.66,23.244 33.216,22.688 33.238,22.688 33.312,22.613 C34.1@33.312,22.488 33.306,22.481 33.306,21.706 v1(33.3,21.7) ; IC9.9@33.15,26.625 33.16,26.635 33.16,27.552 33.34,27.732 v1(33.34,27.8) 33.407,27.8 33.764,28.157 37.628,28.157 X7.B9@37.635,28.15 X7.A4@39.365,28.15 ; v1(35.875,25.505) 35.943,25.505 36.088,25.65 X7.B4@37.635,25.65 X7.A9@39.365,25.65
  Top Layer w0.5: v1(12.99,17.204) 13.1,17.094 13.1,16.5 13.15,16.45 IC10.4@13.4,16.45
  Int2 (PWR) w0.5: v1(12.99,17.204) 12.99,17.38 15.38,19.77 16.37,19.77 20.6,24 30.31,24 30.41,24.1 32.265,24.1 33.7,25.535 ; v1(33.34,27.8) 33.7,27.44 33.7,25.535 ; v1(35.875,25.505) 35.845,25.535 33.7,25.535
  Bottom Layer w0.25: v1(33.3,21.7) 33.3,23.51 33.193,23.617 33.193,25.359 33.34,25.505 ; v1(33.34,27.8) 33.34,25.505 ; v1(35.875,25.505) 33.34,25.505
VCC: C7.2 C9.2 C11.2 C12.2 C13.2 C14.2 C15.2 C18.1 C37.2 C38.2 C39.2 C40.2 C41.2 IC1.8 IC2.8 IC3.8 IC4.8 IC5.4 IC5.9 IC5.11 IC5.14 IC5.15 IC5.18 IC6.17 IC11.1 R2.2 R7.2 R10.2 R23.1 R24.2 R25.2 X5.2 | length 38.7
  Top Layer w0.2: IC6.17@22.397,16.931 23.031,17.565 23.558,17.565 C18.1@23.646,17.654 23.788,17.654 24.177,18.043 24.343,18.043 v1(24.4,18.1) ; v1(23.496,22.974) 23.553,23.031 23.553,24.233 X5.2@23.77,24.45 ; v1(25.1,17.6) 25.157,17.657 25.157,17.93 25.685,18.458 25.685,18.596 26.372,18.596 26.93,19.154 IC11.1@26.946,19.154 ; R24.2@25.1,21.4 26.225,21.4 26.172,21.453 v1(26.172,22.028)
  Top Layer w0.25: R7.2@15.3,12 15.425,12 15.65,12.225 15.65,12.365 15.95,12.665 15.95,12.775 16.175,13 R10.2@16.3,13 16.352,13.052 16.352,13.652 v1(16.4,13.7) ; v1(16.5,7.6) 16.548,7.552 17.248,7.552 C39.2@17.3,7.5 17.325,7.525 18.325,7.525 IC3.8@18.35,7.55 ; IC2.8@17.5,24.6 17.525,24.625 18.525,24.625 C38.2@18.55,24.65 ; C38.2@18.575,24.675 19.475,24.675 v1(19.5,24.7) ; R2.2@18.6,20.3 18.6,20.425 18.675,20.5 19.132,20.5 19.332,20.7 v1(19.4,20.7) ; v1(23.3,6.6) C40.2@24.1,6.6 ; C40.2@24.082,6.6 24.225,6.6 24.475,6.85 24.535,6.85 24.96,7.275 25.175,7.275 25.2,7.3 IC4.8@25.2,7.4 ; IC1.8@28.85,24.45 28.85,24.35 29.6,23.6 29.6,23.375 29.65,23.325 29.775,23.325 29.802,23.352 30.652,23.352 v1(30.7,23.4)
  Top Layer w0.3: v1(23.814,12.1) 23.852,12.138 23.852,12.677 24.075,12.9 C9.2@25.2,12.9 IC5.4@26.9,12.9 ; C11.2@27.9,16.8 v1(28.8,16.8) ; IC5.18@28.7,15.2 28.7,15.952 28.8,16.052 28.8,16.708 v1@28.762,16.746 ; IC5.9@29.2,11.6 C12.2@29.2,10.3 29.325,10.3 29.899,9.726 v1(29.936,9.726) ; IC5.11@30.5,12.4 31.15,11.75 31.75,11.75 31.8,11.7 31.8,11.475 31.463,11.138 31.138,11.138 v1(31.1,11.1) ; IC5.14@30.5,13.9 31.045,13.9 31.25,14.105 31.25,14.17 31.605,14.525 31.75,14.525 C14.2@31.8,14.575 ; IC5.15@30.5,14.4 30.9,14.8 30.9,15.725 31.287,16.112 31.675,16.5 C15.2@31.8,16.5 ; 31.35,16.05 v1(31.8,15.6) C14.2@31.8,14.575 ; C14.2@31.8,14.7 C14.2@31.8,14.575 ; R23.1@34.9,21.6 34.973,21.6 35.023,21.55 35.023,20.988 v1(35.062,20.95)
VINA: C24.2 IC7.8 R4.2 R5.1 S1.2 S1.5 | length 8.5
  Top Layer w0.25: S1.5@8.9,1.4 S1.2@8.9,3.8 8.9,4.1 9.275,4.475 9.8,4.475 10.7,5.375 R4.2@10.7,5.5 R5.1@10.7,6.5 ; IC7.8@10.7,7.9 R5.1@10.7,6.5 ; C24.2@11.6,6.5 R5.1@10.7,6.5
pads on no net: IC6.2 IC6.3 IC9.10 IC9.11 IC9.12 IC9.13 IC9.14 IC9.15 IC9.16 S1.1 S1.4 S1.6 X5.6 X7.0 X7.A8 X7.B8
copper on no net: | length 4.2
  Top Layer w0.2: v2(17.3,13) 17.334,13 19.003,14.669 ; v2(17.3,14) 17.325,14.025 17.794,14.025 18.72,14.951

## Polygon pours and split planes (outlines as drawn)
GND on Bottom Layer "GND_L04_P001" (solid, remove dead copper, pour order 1): 0.1,13 1.1,13 ccw(c1.1,14) 2.1,14 2.1,18 ccw(c1.1,18) 1.1,19 0.1,19 0.1,31.9 19.2,31.9 19.2,30.9 ccw(c20.2,30.9) 20.2,29.9 24.2,29.9 ccw(c24.2,30.9) 25.2,30.9 25.2,31.9 44.4,31.9 44.4,0.1 25.2,0.1 25.2,1.1 ccw(c24.2,1.1) 24.2,2.1 20.2,2.1 ccw(c20.2,1.1) 19.2,1.1 19.2,0.1 0.1,0.1
GND on Int1 (GND) "GND_L02_P000" (solid, remove dead copper, pour order 0): 0.1,13 1.1,13 ccw(c1.1,14) 2.1,14 2.1,18 ccw(c1.1,18) 1.1,19 0.1,19 0.1,31.9 19.2,31.9 19.2,30.9 ccw(c20.2,30.9) 20.2,29.9 24.2,29.9 ccw(c24.2,30.9) 25.2,30.9 25.2,31.9 44.4,31.9 44.4,0.1 25.2,0.1 25.2,1.1 ccw(c24.2,1.1) 24.2,2.1 20.2,2.1 ccw(c20.2,1.1) 19.2,1.1 19.2,0.1 0.1,0.1
GND on Top Layer "GND_L01_P002" (solid, remove dead copper, pour order 2): 0.1,13 1.1,13 ccw(c1.1,14) 2.1,14 2.1,18 ccw(c1.1,18) 1.1,19 0.1,19 0.1,31.9 19.2,31.9 19.2,30.9 ccw(c20.2,30.9) 20.2,29.9 24.2,29.9 ccw(c24.2,30.9) 25.2,30.9 25.2,31.9 44.4,31.9 44.4,0.1 25.2,0.1 25.2,1.1 ccw(c24.2,1.1) 24.2,2.1 20.2,2.1 ccw(c20.2,1.1) 19.2,1.1 19.2,0.1 0.1,0.1
VCC on Int2 (PWR) "VCC_L03_P003" (solid, remove dead copper, pour order 3): 0.1,13 1.1,13 ccw(c1.1,14) 2.1,14 2.1,18 ccw(c1.1,18) 1.1,19 0.1,19 0.1,31.9 19.2,31.9 19.2,30.9 ccw(c20.2,30.9) 20.2,29.9 24.2,29.9 ccw(c24.2,30.9) 25.2,30.9 25.2,31.9 44.4,31.9 44.4,0.1 25.2,0.1 25.2,1.1 ccw(c24.2,1.1) 24.2,2.1 20.2,2.1 ccw(c20.2,1.1) 19.2,1.1 19.2,0.1 0.1,0.1

## Keep-outs
Keep-Out Layer:
  the board outline again, w0.2

## Other copper
Top Layer:
  region net NetIC7_2: 11.313,11.112 11.313,10.687 11.063,10.687 11.087,10.712 11.087,15.028 12.287,15.028 12.287,12.087
  region net NetIC7_4: 10.075,11.125 10.075,10.7 10.325,10.7 10.3,10.725 10.3,15.04 9.1,15.04 9.1,12.1
  region net NetC26_2: 2.06,23.2 5.575,23.2 5.675,23.1 6.75,23.1 6.95,23.3 7.85,23.3 7.9,23.35 7.9,24.25 7.85,24.3 5.24,24.3 5.14,24.4 2.06,24.4
  region net NetC4_1: 35.6,12.275 36,12.275 36.5,12.775 37,12.775 37,13.775 37.125,13.9 36.725,14.3 36.475,14.3 36.2,14.025 36,14.025 35.6,13.625 35.6,13.375

## Silkscreen, mask and mechanical layers (free items; w line width, h text height)
Top Overlay:
  lines w0.1: 23.9,41 30.4,41 ; 54.3,14.37 54.3,41.68
Top Solder:
  text "OFF" at 12.954,5.254 h1.52
Bottom Solder:
  text "V1.0.0 TKengineering" at 41.049,3.636 h1.52
  text "SpeedChampion 2G4Hz" at 42,2.171 h1.52
Mechanical 1:
  the board outline again, w0.2
  text "Front" at 19.154,33.354 h1.52
  text "Back" at 19.854,-2.446 h1.52